# Altium PCB MT-ACcharger V1.0.0.PcbDoc (part 1 of 2)
Units mil, origin at the board's own origin, x right, y up, seen from the top; angles counter-clockwise.
Board outline 4330 x 3150 mil, 2 copper layers (Top Layer, Bottom Layer); 249 components, 156 nets, 1213 pads, 95 vias.
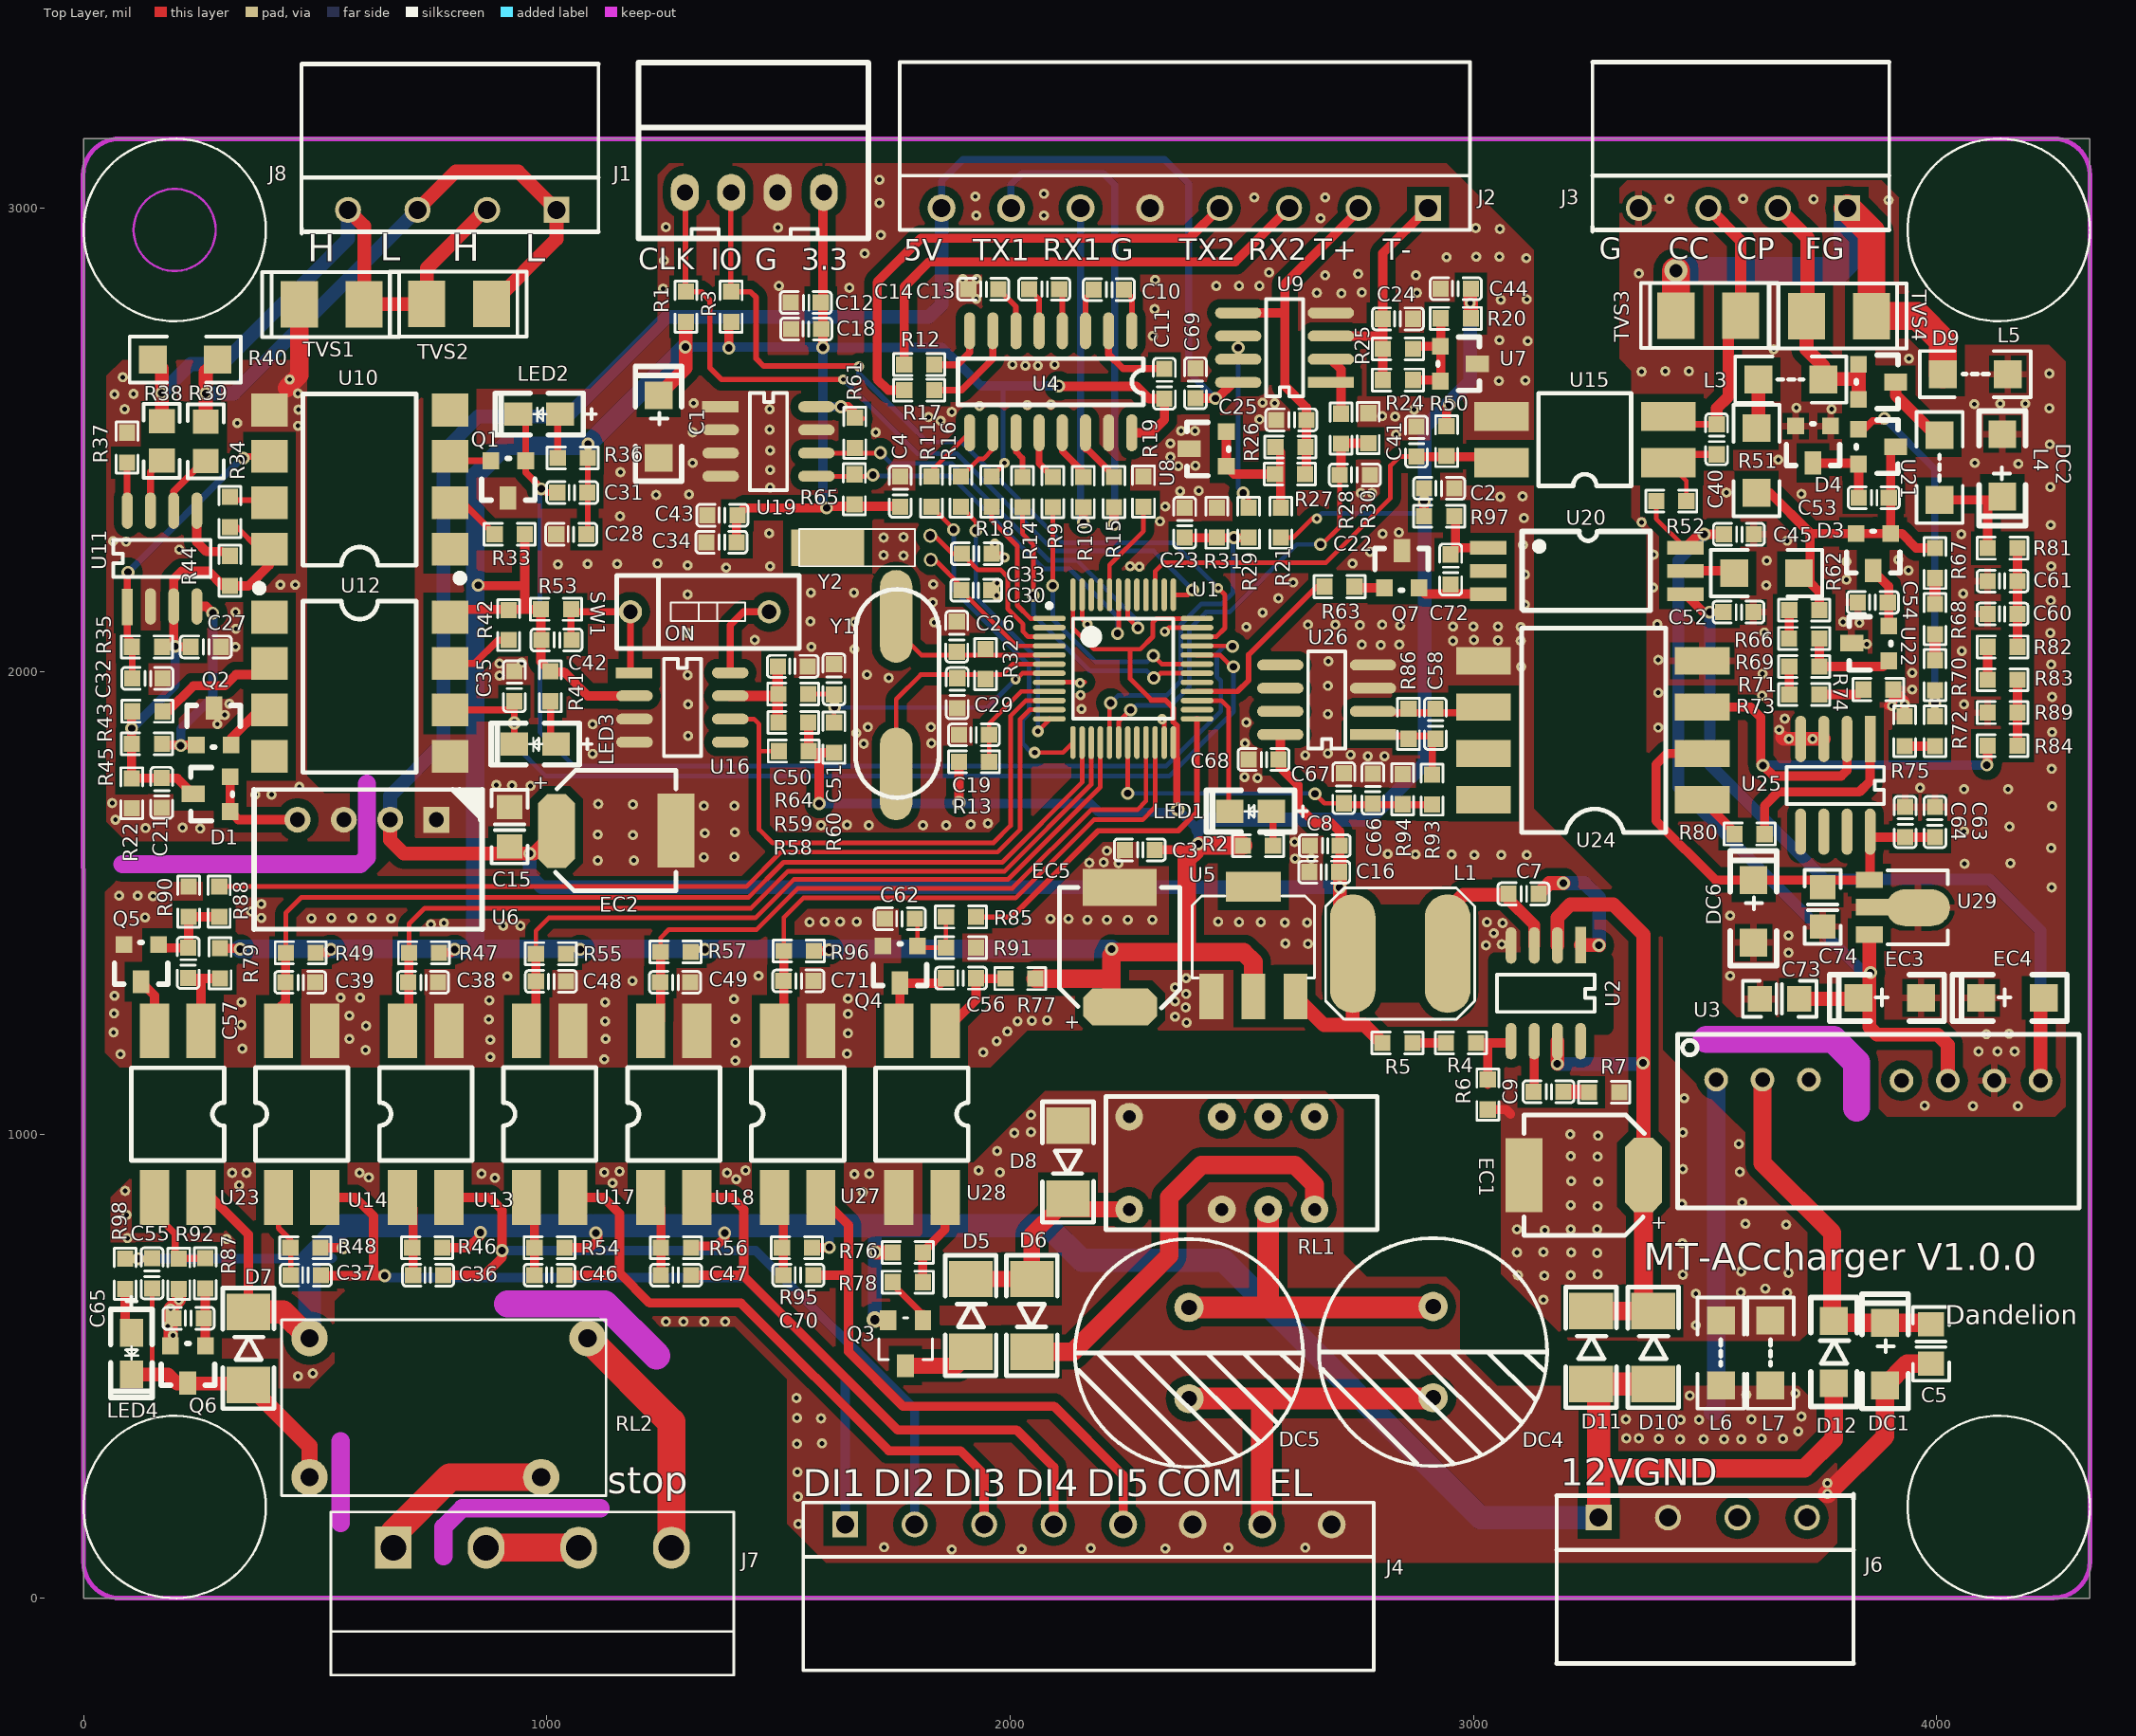
[diagram p0: Top Layer view]
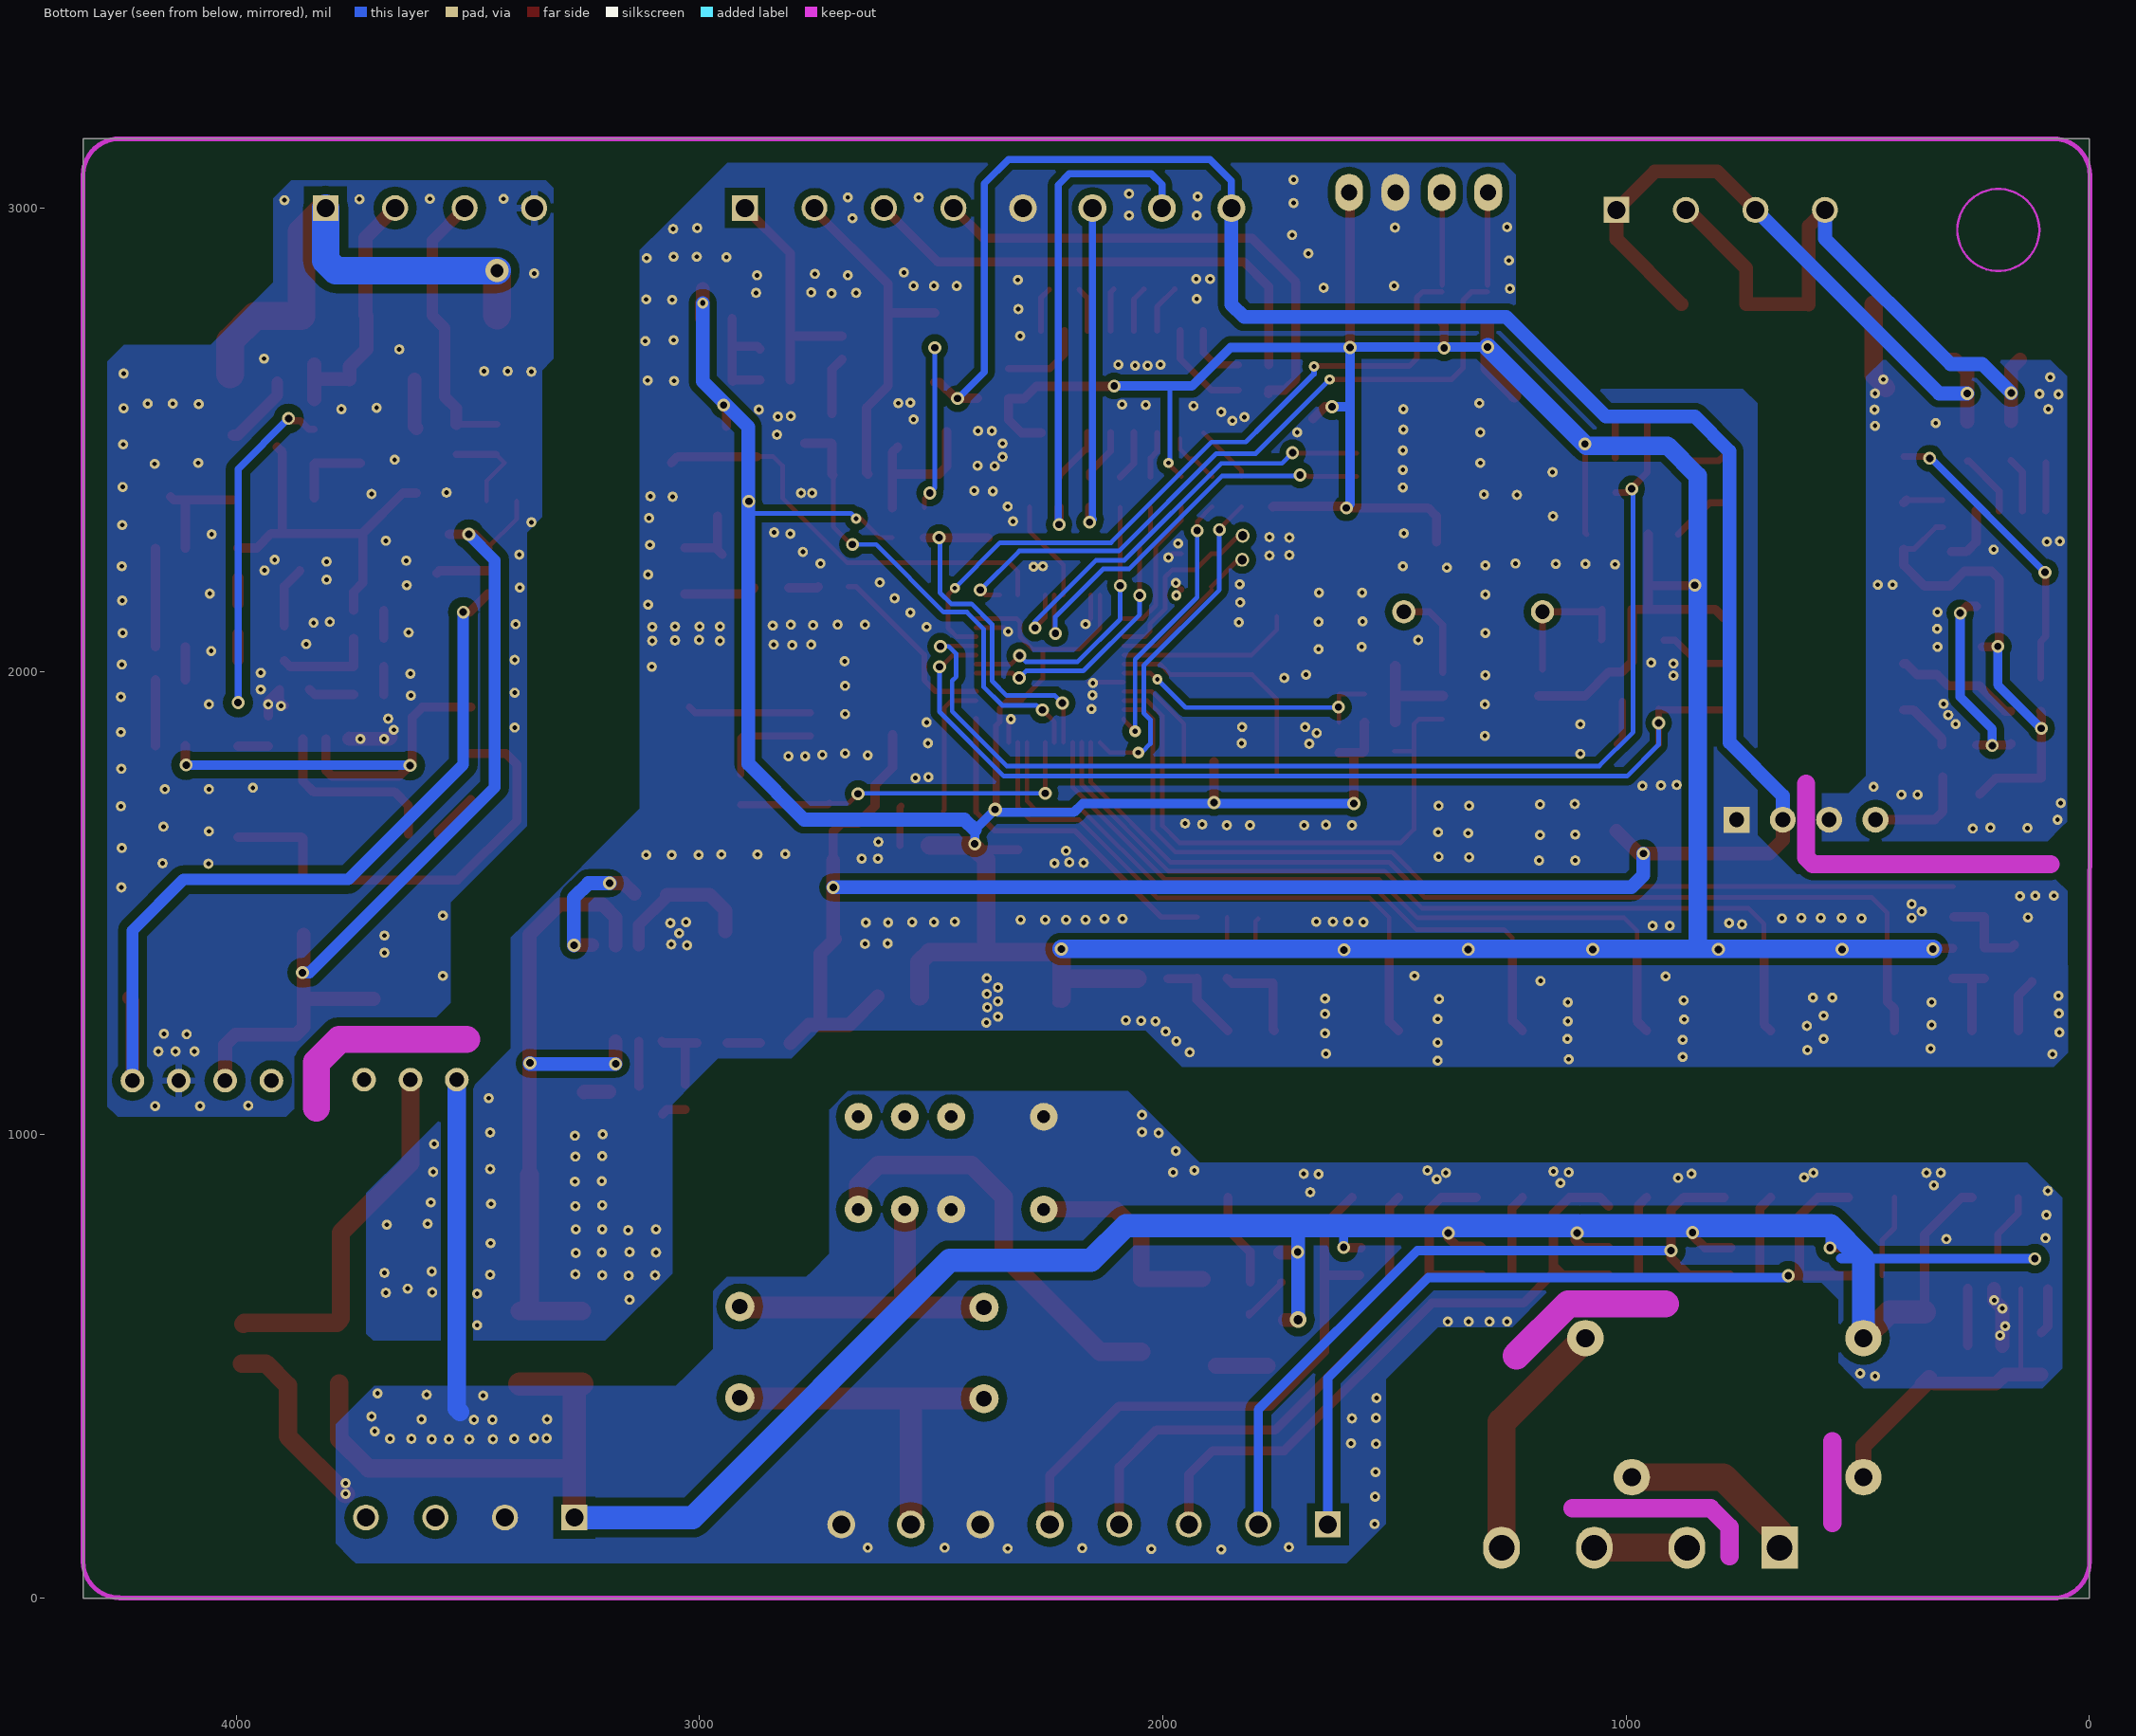
[diagram p1: Bottom Layer view, seen from below]

## Layer stack, top to bottom
Top Layer: signal copper 1.4
Dielectric: core 12.6, FR-4, Dk 4.8
Bottom Layer: signal copper 1.4

## Board outline
0,0 0,94 0,3150 4330,3150 4330,0

## Design rules (kind name [scope] priority, off if disabled: settings)
Clearance [InPoly] p1: gap=15
Clearance Clearance_1 [All] p2: gap=7
ComponentClearance [All] p1 off: gap=1 collisioncheckmode=3 verticalgap=1 showdistances=FALSE
FabricationTestpoint [(IsPad And (OnTopLayer Or OnBottomLayer))] p1: side=3 testpointundercomponent=TRUE minsize=40 maxsize=100 preferedsize=60 minholesize=0 maxholesize=40 preferedholesize=32 testpointgrid=1 allowsidetop=TRUE allowsidebottom=TRUE usegrid=TRUE gridtolerance=0.01
HoleSize [All] p1: absolutevalues=TRUE maxlimit=200 minlimit=1 maxpercent=80.000 minpercent=20.000
MinimumSolderMaskSliver [All] p1: minsoldermaskwidth=0
PlaneConnect [All] p1: planeconnectstyle=Direct reliefexpansion=20 reliefentries=4 reliefconductorwidth=10 reliefairgap=10
PolygonConnect [IsVia] p1: connectstyle=Direct reliefconductorwidth=10 reliefentries=4 polygonreliefangle="90 Angle" airgapwidth=10
PolygonConnect PolygonConnect_1 [All] p2: connectstyle=Direct reliefconductorwidth=15 reliefentries=4 polygonreliefangle="90 Angle" airgapwidth=10
RoutingVias [All] p1: holewidth=28 width=50 viastyle="Through Hole" minholewidth=10 minwidth=10 maxholewidth=28 maxwidth=50
SilkToSilkClearance [All] p1: silktosilkclearance=0
SilkToSolderMaskClearance [IsPad] p1: minsilkscreentomaskgap=0 clearancetoexposedcopper=TRUE
SolderMaskExpansion [All] p1: expansion=4
Width [All] p1: maxlimit=393.7 minlimit=5 preferedwidth=10
21 further rules are at their usual default settings.

## Components (designator, comment, footprint, x,y, rotation, side; value= is the part's Value field where it differs from the comment)
C1 "10uF,16V" CA1206 1241,2596 r90 top
C2 "104" 0603C 2926,2395 r180 top
C3 "104" 0603C 2280,1615 r0 top
C4 "104" 0603C 1763,2388 r270 top
C5 "104" 0805C 3987,507 r90 top
C7 "103" 0603C 3108,1520 r0 top
C8 "104" 0603C 2679,1624 r0 top
C9 "3.9nF" 0603C 3162,1093 r0 top
C10 "0.1uF" 0603C 2213.02,2824.15 r0 top
C11 "0.1uF" 0603C 2333,2621 r270 top
C12 "0.1uF" 0603C 1559,2796 r0 top
C13 "0.1uF" 0603C 2073.52,2825.15 r0 top
C14 "0.1uF" 0603C 1942.02,2825.15 r0 top
C15 "1uF" 0805C 919,1623 r90 top
C16 "0.1uF" 0603C 2678,1567 r180 top
C18 "0.1uF" 0603C 1560,2739 r180 top
C19 "10nF" 0603C 1922,1863 r180 top
C21 "0.1uF" 0603C 169,1738 r270 top
C22 "103" 0603C 2744,2424 r180 top
C23 "103" 0603C 2377,2321 r270 top
C24 "103" 0603C 2836.99,2761 r180 top
C25 "103" 0603C 2607,2543 r0 top
C26 "22pF" 0603C 1885,2075 r270 top
C27 "104" 0603C 264,2053 r0 top
C28 "104" 0603C 1053,2296 r180 top
C29 "22pF" 0603C 1886,1953 r90 top
C30 "15pF" 0603C 1927,2175 r180 top
C31 "100pF" 0603C 1055,2386 r180 top
C32 "220pF" 0603C 138,1985 r0 top
C33 "15pF" 0603C 1928,2254 r180 top
C34 "104" 0603C 1377,2279 r0 top
C35 "100pF" 0603C 930,1968 r90 top
C36 "104" 0603C 744,697 r180 top
C37 "104" 0603C 480,697 r180 top
C38 "104" 0603C 733,1329 r0 top
C39 "104" 0603C 468,1329 r0 top
C40 "104" 0603C 3525,2501 r90 top
C41 "104" 0603C 2877,2496 r90 top
C42 "104" 0603C 1021,2068 r0 top
C43 "0.1uF" 0603C 1379,2337 r180 top
C44 "104" 0603C 2962,2826 r180 top
C45 "104" 0603C 3573,2296 r0 top
C46 "104" 0603C 1006,697 r180 top
C47 "104" 0603C 1279,697 r180 top
C48 "104" 0603C 1009,1331 r0 top
C49 "104" 0603C 1277,1329 r0 top
C50 "104" 0603C 1531,2011 r180 top
C51 "104" 0603C 1620,1983 r270 top
C52 "104" 0603C 3572,2128 r0 top
C53 "104" 0603C 3864,2375 r0 top
C54 "104" 0603C 3862,2149 r180 top
C55 "104" 0603C 148,701 r270 top
C56 "104" 0603C 1894,1338 r180 top
C57 "104" 0603C 226,1371 r90 top
C58 "103" 0603C 2918,1887 r90 top
C60 "104" 0603C 4142,2124 r180 top
C61 "103" 0603C 4142,2195 r180 top
C62 "104" 0603C 1762,1466 r180 top
C63 "104" 0603C 3996,1675 r270 top
C64 "104" 0603C 3932,1675 r90 top
C65 "104" 0603C 227,604 r180 top
C66 "104" 0603C 2783,1747 r270 top
C67 "103" 0603C 2720,1748 r270 top
C68 "104" 0603C 2547,1810 r0 top
C69 "104" 0603C 2400,2622 r270 top
C70 "104" 0603C 1543,697 r180 top
C71 "104" 0603C 1543,1332 r0 top
C72 "100pF" 0603C 2951,2220 r270 top
C73 "0.1uF" 0805C 3619,1294 r0 top
C74 "0.1uF" 0805C 3753,1450 r90 top
D1 "BAV54C" SOT23#1 317,1698 r90 top
D3 "BAV54C" SOT23#1 3900,2298 r180 top
D4 "BAV54C" SOT23#1 3770,2530 r180 top
D5 "1N4007" DO-214AC 1915,610 r90 top
D6 "1N4007" DO-214AC 2047,610 r270 top
D7 "1N4007" DO-214AC 356,539 r90 top
D8 "1N4007" DO-214AC 2125,941 r270 top
D9 "BAV54C" SOT23#1 3831,2662 r270 top
D10 "1N4007" DO-214AC 3388,541 r90 top
D11 "1N4007" DO-214AC 3254,541 r90 top
D12 "B2020W" 1206D 3778,531 r90 top
DC1 "10uF,16V" CA1206 3888,593.92 r90 top
DC2 "10uF,16V" CA1206 4142,2377 r270 top
DC4 "2200uF/25V" CAP12.5*20 2913,531 r270 top
DC5 "2200uF/25V" CAP12.5*20 2386,529 r270 top
DC6 "10uF,16V" CA1206 3604,1550 r90 top
EC1 "100uF,25V" C100UF16VEJ 3367,913 r180 top
EC2 "100uF/35V" C100UF16VEJ 1021,1656 r0 top
EC3 "10uF,25V" CA1206 3831,1295 r180 top
EC4 "10uF,25V" CA1206 4096,1295 r180 top
EC5 "100uF/35V" C100UF16VEJ 2237,1276 r90 top
J1 "CON4" CON04_2.54 1448,3034 r0 top
J2 "CON8" KF2EDG-8P-3.81mm 2902,3000 r180 top
J3 "HEADER 4" KF2EDG-4P-3.81mm 3807,3000 r180 top
J4 "CON8" KF2EDG-8P-3.81mm 1644,159 r0 top
J6 "HEADER 4" KF2EDG-4P-3.81mm 3270,174 r0 top
J7 "4 HEADER" CON-5.08MM-4P 969,109 r0 top locked (schematic designator JP1)
J8 "4 HEADER" KF2EDG-4P-3.81mm 1021,2996 r180 top
L1 "22uH" LC7*7*3_L 2842,1391 r180 top locked
L3 "100uH" 1206L#1 3685,2630 r180 top
L4 "100uH" 1206L#1 4006,2440 r270 top
L5 "100uH" 1206L#2 4013,2641 r0 top
L6 "1uH" 1206L#1 3534,529 r90 top
L7 "1uH" 1206L#1 3641,529 r90 top
LED1 "Green" D0805 2564,1698 r270 top
LED2 "Green" D0805 1029,2555 r270 top
LED3 "Green" D0805 1020,1843 r270 top
LED4 "Green" D0805 104,573 r0 top
Q1 "8550" SOT23#1 954,2455 r180 top
Q2 "8550" SOT23#1 244,1841 r0 top
Q3 "AO3407" SOT-23L 1812,600 r180 top
Q4 "9013" SOT23#2 1800,1408 r180 top
Q5 "9013" SOT23#2 162,1411 r180 top
Q6 "9013" SOT23#2 263,545.33 r180 top
Q7 "8550" SOT23#1 2808,2180 r0 top
R1 "10K" 0603R 1300,2787 r270 top
R2 "4.7K" 0603R 2535,1624 r180 top
R3 "10K" 0603R 1398,2787 r270 top
R4 "1.2k/1%" 0603R 2973,1198 r0 top
R5 "43k/1%" 0603R 2836,1198 r0 top
R6 "10k/1%" 0603R 3031,1087 r270 top
R7 "6.8k" 0603R 3282,1092 r0 top
R9 "0R" 0603R 2092.33,2387.01 r90 top
R10 "10R" 0603R 2158.17,2387 r270 top
R11 "0R" 0603R 1830,2388 r90 top
R12 "10R" 0603R 1804,2662 r180 top
R13 "0R" 0603R 1922,1805 r0 top
R14 "0R" 0603R 2026.5,2387.01 r90 top
R15 "10R" 0603R 2224,2387 r270 top
R16 "0R" 0603R 1894,2388 r90 top
R17 "10R" 0603R 1804,2607 r180 top
R18 "0R" 0603R 1960,2388 r90 top
R19 "0R" 0603R 2288,2388 r270 top
R20 "100R" 0603R 2962,2762 r0 top
R21 "100R" 0603R 2584,2320.99 r270 top
R22 "Res Semi" 0603R 104,1737 r90 top
R24 "4k7/1%" 0603R 2837,2629 r0 top
R25 "4k7/1%" 0603R 2837,2696 r0 top
R26 "4k7/1%" 0603R 2605,2484.5 r180 top
R27 "4k7/1%" 0603R 2604,2426 r180 top
R28 "2k/1%" 0603R 2714,2524 r90 top
R29 "2k/1%" 0603R 2515,2321 r90 top
R30 "4k7/1%" 0603R 2773,2525 r270 top
R31 "4k7/1%" 0603R 2446,2320.99 r270 top
R32 "1MR" 0603R 1947,2016 r270 top
R33 "75R" 0603R 920,2296 r0 top
R34 "NC" 0603R 316,2344 r270 top
R35 "1.2k" 0603R 137,2053 r0 top
R36 "5.1K" 0603R 1056,2461 r0 top
R37 "20k" 0603R 94,2483 r90 top
R38 "10R" 0805R 169,2455 r90 top
R39 "10R" 0805R 264,2454 r90 top
R40 "120R/NC" 1206R 290,2673 r180 top
R41 "1.2K" 0603R 1008,1968 r270 top
R42 "NC" 0603R 918,2100 r270 top
R43 "150R" 0603R 138,1914 r0 top
R44 "10k" 0603R 316,2217 r90 top
R45 "10K" 0603R 137,1844 r0 top
R46 "10K" 0603R 742,756 r0 top
R47 "10K" 0603R 735,1393 r0 top
R48 "10K" 0603R 479,756 r0 top
R49 "10K" 0603R 469,1393 r0 top
R50 "10K" 0603R 2942,2497 r270 top
R51 "1K" 1206R 3611,2385 r90 top
R52 "10K" 0603R 3427,2368 r0 top
R53 "10K" 0603R 1020,2134 r180 top
R54 "10K" 0603R 1006,756 r0 top
R55 "10K" 0603R 1009,1391 r0 top
R56 "10K" 0603R 1279,756 r0 top
R57 "10K" 0603R 1278,1395 r0 top
R58 "10K" 0603R 1533,1828 r180 top
R59 "10K" 0603R 1532,1890 r180 top
R60 "10K" 0603R 1620,1857 r90 top
R61 "10k" 0603R 1665,2515 r270 top
R62 "10R" 1206R 3703,2212 r180 top
R63 "1k" 0603R 2711,2183 r0 top
R64 "1K" 0603R 1532,1951 r0 top
R65 "10K" 0603R 1664,2393 r90 top
R66 "20K/1%" 0603R 3714,2132 r0 top
R67 "4K7/1%" 0603R 3996,2234 r90 top
R68 "51R/1%" 0603R 3996,2113 r90 top
R69 "2K7/1%" 0603R 3713.99,2071.33 r180 top
R70 "1K1/1%" 0603R 3996,1992 r90 top
R71 "1K1/1%" 0603R 3714,2010.67 r0 top
R72 "2K7/1%" 0603R 3996,1871 r90 top
R73 "51R/1%" 0603R 3714,1950 r180 top
R74 "4K7/1%" 0603R 3874,1961 r180 top
R75 "20K/1%" 0603R 3931,1871 r270 top
R76 "10K" 0603R 1779,746 r180 top
R77 "1K" 0603R 2022,1337 r180 top
R78 "5.1K" 0603R 1779,682 r180 top
R79 "2K" 0603R 295,1370 r90 top
R80 "200R/1%" 0603R 3596,1649 r180 top
R81 "10R" 0603R 4142.01,2266 r0 top
R82 "33K/1%" 0603R 4142,2053 r180 top
R83 "33K/1%" 0603R 4142.01,1982 r0 top
R84 "31K6/1%" 0603R 4142,1840 r180 top
R85 "2K" 0603R 1894,1470 r180 top
R86 "100K/1%" 0603R 2860,1887 r90 top
R87 "5.1K" 0603R 263,701 r270 top
R88 "10K" 0603R 293,1503 r90 top
R89 "10K/1%" 0603R 4142.01,1911 r0 top
R90 "3K" 0603R 227,1503 r90 top
R91 "10K" 0603R 1894,1404 r180 top
R92 "4K7" 0603R 206,700 r270 top
R93 "10K/1%" 0603R 2911,1745 r270 top
R94 "20K/1%" 0603R 2847.48,1745.85 r90 top
R95 "10K" 0603R 1540,756 r0 top
R96 "10K" 0603R 1544,1397 r0 top
R97 "200R" 0603R 2926,2335 r0 top
R98 "10K" 0603R 90,700 r270 top
RL1 "G6S-2" G6S-2 2257,1039 r0 top
RL2 "JQ1P-12V" HF32F-12V 488,301 r180 top
SW1 "拨码开关" SW1 1180,2129 r270 top
TVS1 "BA301N" 3528TVS 536,2792 r0 top
TVS2 "BA301N" 3528TVS 811,2793 r0 top
TVS3 "BA301N" 3528TVS 3507,2768 r180 top
TVS4 "BA301N" 3528TVS 3789,2767 r0 top
U1 "STM32F103C8T6" LQFP48_N 2244,2006 r0 top locked
U2 "EUP3484" SOP8#1 3231,1405 r270 top
U3 "WRA1215S-3WR2" WRA1215S-3WR2 3874,1118 r0 top (schematic designator U8)
U4 "SP3232" SO-16 2263,2735 r270 top
U5 "AMS1117-3.3" SOT223 2525,1417 r0 top locked
U6 "B0505D-1W" B0505S-1WR2 762,1680 r180 top
U7 "TL431" SOT23#1 2928,2701 r270 top
U8 "TL431" SOT23#1 2467,2443 r90 top
U9 "LM258" SOP8#2 2692,2624 r180 top
U10 "6N136" LC-SMD-8_6.3mm 596,2414 r90 top
U11 "PCA82C251T" SOP8#1 95,2144 r90 top
U12 "6N136" LC-SMD-8_6.3mm 596,1967 r270 top
U13 "PS2501L-1" DIP-4 688.3,865.21 r180 top
U14 "PS2501L-1" DIP-4 420.63,865.21 r180 top
U15 "PS2501L-1" DIP-4 3420,2450 r270 top
U16 "SP706SEN" SOP8#1 1193,1997 r0 top
U17 "PS2501L-1" DIP-4 955.96,865.21 r180 top
U18 "PS2501L-1" DIP-4 1223.63,865.21 r180 top
U19 "AT24C16" SOP8#1 1379,2571 r0 top
U20 "W314" "w314 - duplicate" 3032,2267 r270 top
U21 "CJ431" SOT23#1 3831,2522 r270 top
U22 "CJ431" SOT23#2 3897,2023 r90 top
U23 "PS2501L-1" DIP-4 254,1224 r0 top
U24 "HCNR201" "HCNR201 - S" 3494,1723 r180 top
U25 "LM258" SOP8#2 3856,1854 r270 top
U26 "LM258" SOP8#2 2783,1864 r180 top
U27 "PS2501L-1" DIP-4 1491.3,865.21 r180 top
U28 "PS2501L-1" DIP-4 1860,1224 r0 top
U29 "LM78L05" SOT-89 3854,1550 r270 top
Y1 "8MHz" ZS_SMD 1754,1779 r90 top
Y2 "32.768KHz" ZS-32.768 1720,2267 r180 top

## Footprints (in the part's own frame and the unit in brackets; to place one, negate y for a bottom-side part, rotate by r counter-clockwise, add the part's x,y. Pads: shape width x height; smd on the part's side, far side on the other; paste and mask are expansions set on the pad)
0603C [mil]
  rect 35x35 smd: 1(-32.5,0) 2(32.5,0)
  silkscreen extent -55,-24 55,24
0603R [mil]
  rect 35x35 smd: 1(-32.5,0) 2(32.5,0)
  silkscreen extent -55,-24 55,24
0805C [mil]
  rect 52x56 smd: 1(-0.58,-0.68) 2(84.42,-0.68)
  silkscreen extent -38,-40 121,38
0805R [mil]
  rect 52x56 smd: 1(0,0) 2(85,0)
  silkscreen extent -37,-39 122,39
1206D [mil]
  rect 60x60 smd: 1(-67.5,0) 2(67.5,0)
  silkscreen extent -118,-50 118,50
1206L#1 [mil]
  rect 60x60 smd: 1(-70,0) 2(70,0)
  silkscreen extent -120,-50 120,50
1206L#2 [mil]
  rect 60x60 smd: 1(0.16,0.47) 2(140.16,0.47)
  silkscreen extent -50,-50 190,50
1206R [mil]
  rect 60x60 smd: 1(0.33,-0.04) 2(140.33,-0.04)
  silkscreen extent -50,-50 190,50
3528TVS [mil]
  rect 80x100 smd: 1(70,0) 2(-70,0)
  silkscreen extent -150,-70 146,70
B0505S-1WR2 [mil]
  rect 56x56 hole 32: 1(0,0)
  round 56 hole 32: 4(100,0) 5(300,0) 7(200,0)
  silkscreen extent -98,-65 394,236
C100UF16VEJ [mil]
  oct 80x160 smd: 1(-0.01,-0.43)
  rect 80x160 smd: 2(257.94,0.35)
  silkscreen extent -2,-130 258,130
CA1206 [mil]
  rect 60x60 smd: 1(-0.08,-0.48) 2(-135.08,-0.48)
  silkscreen extent -185,-50 62,50
CAP12.5*20 [mm]
  round 1.6 hole 0.85: 1(-2.5,0) 2(2.5,0)
  silkscreen extent -6.25,-6.25 6.25,6.25
CON04_2.54 [mil]
  oval 60x80 hole 35: 1(-150,0) 2(-50,0) 3(50,0) 4(150,0)
  silkscreen extent -250,-100 246,280
CON-5.08MM-4P [mm] "CON-5.08MM-4P"
  rect 2x2.3 hole 1.4: 1(-7.62,0)
  oval 2x2.3 hole 1.4: 2(-2.54,0) 3(2.54,0) 4(7.62,0)
  silkscreen extent -11.04,-6.98 11.04,1.96
D0805 [mil]
  rect 50x60 smd: 1(-0.34,-0.09) 2(-0.34,-90.09)
  silkscreen extent -45,-140 45,77
DIP-4 [mm]
  rect 1.6x3 smd: 1(-0.008,0.015) 2(-2.548,0.015) 3(-2.548,-9.129) 4(-0.008,-9.129)
  silkscreen extent -3.82,-7.1 1.26,-2.02
DO-214AC [mm]
  rect 2x2.4 smd: 1(-2,0) 2(2,0)
  silkscreen extent -3.3,-1.4 3.3,1.4
G6S-2 [mil]
  round 60 hole 27.56: 1(0,-200) 3(200,-200) 4(300,-200) 5(400,-200) 8(400,0) 9(300,0) 10(200,0) 12(0,0)
  silkscreen extent -50,-244 535,43
"HCNR201 - S" [mm]
  rect 3x1.5 smd: 1(0,0) 2(0,-2.54) 3(0,-5.08) 4(0,-7.62) 5(12,-7.62) 6(12,-5.08) 7(12,-2.54) 8(12,0)
  silkscreen extent 2,-9.41 9.9,1.79
HF32F-12V [mm]
  round 2 hole 1: 1(0,1.016) 2(0,-6.604) 3(-12.7,1.016) 4(-15.24,-6.604)
  silkscreen extent -16.26,-7.62 1.52,2.03
KF2EDG-4P-3.81mm [mil]
  rect 56x56 hole 39.37: 1(0,0)
  round 56 hole 39.37: 2(150,0) 3(300,0) 4(450,0)
  silkscreen extent -91,-315 550,50
KF2EDG-8P-3.81mm [mil]
  rect 56x56 hole 39.37: 1(0,0)
  round 56 hole 39.37: 2(150,0) 3(300,0) 4(450,0)
  round 60 hole 39.37: 5(600,0) 6(750,0) 7(900,0) 8(1050,0)
  silkscreen extent -91,-315 1141,47
LC7*7*3_L [mm]
  oval 2.5x6.5 smd: 1(-2.6,0) 2(2.6,0)
  Top Layer pour cut-out: -1.803,2.705 1.854,2.705 1.854,-2.705 -1.803,-2.705
  silkscreen extent -4.09,-3.61 4.09,3.61, body extent -2.46,-2.4 1.85,2.4, height 3.5
LC-SMD-8_6.3mm [mm]
  rect 1.8x2 smd: 1(-3.81,-4.95) 2(-1.27,-4.95) 3(1.27,-4.95) 4(3.81,-4.95) 5(3.81,4.95) 6(1.27,4.95) 7(-1.27,4.95) 8(-3.81,4.95)
  silkscreen extent -5.6,-5.7 4.7,3.1
LQFP48_N [mm] "Thin QFP, 48-Leads, Body 7x7mm, Pitch 0.5mm, IPC Medium Density"
  oval 1.8x0.3 smd: 1(-4.05,2.75) 2(-4.05,2.25) 3(-4.05,1.75) 4(-4.05,1.25) 5(-4.05,0.75) 6(-4.05,0.25) 7(-4.05,-0.25) 8(-4.05,-0.75) 9(-4.05,-1.25) 10(-4.05,-1.75) 11(-4.05,-2.25) 12(-4.05,-2.75) 25(4.05,-2.75) 26(4.05,-2.25) 27(4.05,-1.75) 28(4.05,-1.25) 29(4.05,-0.75) 30(4.05,-0.25) 31(4.05,0.25) 32(4.05,0.75) 33(4.05,1.25) 34(4.05,1.75) 35(4.05,2.25) 36(4.05,2.75)
  oval 0.3x1.8 smd: 13(-2.75,-4.05) 14(-2.25,-4.05) 15(-1.75,-4.05) 16(-1.25,-4.05) 17(-0.75,-4.05) 18(-0.25,-4.05) 19(0.25,-4.05) 20(0.75,-4.05) 21(1.25,-4.05) 22(1.75,-4.05) 23(2.25,-4.05) 24(2.75,-4.05) 37(2.75,4.05) 38(2.25,4.05) 39(1.75,4.05) 40(1.25,4.05) 41(0.75,4.05) 42(0.25,4.05) 43(-0.25,4.05) 44(-0.75,4.05) 45(-1.25,4.05) 46(-1.75,4.05) 47(-2.25,4.05) 48(-2.75,4.05)
  silkscreen extent -4.17,-2.75 2.75,3.57, body extent -3.5,-3.5 3.5,3.5, height 1.6
SO-16 [mil]
  oval 80x24 smd: 1(-0.2,-0.3) 2(-0.2,-50.3) 3(-0.2,-100.3) 4(-0.2,-150.3) 5(-0.2,-200.3) 6(-0.2,-250.3) 7(-0.2,-300.3) 8(-0.2,-350.3) 9(219.8,-350.3) 10(219.8,-300.3) 11(219.8,-250.3) 12(219.8,-200.3) 13(219.8,-150.3) 14(219.8,-100.3) 15(219.8,-50.3) 16(219.8,-0.3)
  silkscreen extent 60,-375 160,25
SOP8#1 [mm]
  rect 2x0.6 smd: 1(-0.123,0.006)
  oval 2x0.6 smd: 2(-0.093,-1.264) 3(-0.093,-2.534) 4(-0.093,-3.804) 5(5.157,-3.804) 6(5.157,-2.534) 7(5.157,-1.264) 8(5.157,0.006)
  silkscreen extent 1.52,-4.57 3.55,0.77
SOP8#2 [mm]
  rect 2.54x0.6 smd: 1(-0.006,0.006)
  oval 2.54x0.6 smd: 2(-0.006,-1.264) 3(-0.006,-2.534) 4(-0.006,-3.804) 5(5.074,-3.804) 6(5.074,-2.534) 7(5.074,-1.264) 8(5.074,0.006)
  silkscreen extent 1.52,-4.57 3.55,0.77
SOT23#1 [mil]
  rect 36x36 smd: 1(-0.49,0.35) 3(74.51,0.35)
  rect 36x50 smd: 2(37.51,80.35)
  silkscreen extent -20,-5 95,85
SOT23#2 [mil]
  rect 36x36 smd: 1(-0.08,0.75) 3(74.92,0.75)
  rect 36x50 smd: 2(37.92,80.75)
  silkscreen extent -20,-4 95,86
SOT223 [mm]
  rect 1.3x2.5 smd: 1(-2.3,-3) 2(0,-3) 3(2.3,-3)
  rect 3x1.65 smd: 4(0,3)
  silkscreen extent -3.35,-2.01 3.35,2.5
SOT-23L [mm]
  rect 0.9x1.1 smd: 1(0,0) 3(1.905,0)
  rect 0.914x1.27 smd: 2(0.965,2.5)
  silkscreen extent -0.51,-0.13 2.41,2.16
SOT-89 [mm]
  rect 0.9x1.473 smd: 1(0,0.006) 3(2.994,0.006)
  rect 0.9x2 smd: 2(1.494,0.273)
  oval 2.032x3.5 smd: 2(1.519,2.686)
  silkscreen extent -0.53,1.02 3.53,4.32
SW1 [mm]
  round 1.27 hole 0.8: 1(0.011,0.015) 2(0.011,7.62)
  silkscreen extent -1.99,-0.74 2.01,9.26
"w314 - duplicate" [mm]
  rect 0.76x2 smd: 1(0,0) 2(1.27,0) 3(2.54,0) 4(2.54,10.8) 5(1.27,10.8) 6(0,10.8)
  silkscreen extent -0.89,1.85 3.43,8.89
WRA1215S-3WR2 [mm] "WRA1215S-3WR2"
  round 1.3 hole 0.8: 1(-8.89,0.025) 2(-6.35,0.025) 3(-3.81,0.025) 5(1.27,-0.025) 6(3.81,-0.025) 7(6.35,-0.025) 8(8.89,-0.025)
  silkscreen extent -11,-7 11,2.5
ZS-32.768 [mil]
  round 30 hole 20: 1(-107.67,-26) 2(-108.67,26)
  rect 157.48x78.74 smd: 3(114,0)
  silkscreen extent -75,-40 175,40
ZS_SMD [mil]
  oval 200x70 smd: 1(0,0) 2(340,0)
  silkscreen extent -51,-92 399,88

## Part data
C1 DC2: library part CAP2, "贴片钽电容/16V/10uF/A型3216/AVX"
C2 C3 C38 C39 C48 C49 C71 C72: library part CAP, "0603贴片电容/50V/0.1uF/±10%/X7R"
C4 C19 C27 C28 C29 C31 C32 C33 C34 C35 C36 C37 C42 C43 C44 C45 C46 C47 C50 C51 C52 C53 C54 C60 C63 C64 C66 C68 C69 C70: library part CAP1, "0603贴片电容/50V/0.1uF/±10%/X7R"
C5 C8 C10 C11 C12 C13 C14 C15 C16 C18 C24 C25 C40 C41 C55 C56 C57 C62 C65 C73 C74: library part CAP, "Capacitor"
C7 C9: library part CAP
C21: library part "Cap Semi", "Capacitor (Semiconductor SIM Model)"
C22 C23: library part CAP1, "Capacitor"
C26 C30: library part CAP1, "0603贴片电容/50V/1uF/±10%/X7R"
C58 C61 C67: library part CAP1, "0603贴片电容/50V/10nF/±10%/X7R"
D5 D6 D7 D8 D10 D11 D12: library part DIODE
DC1 DC4 DC5 DC6 EC2 EC5: library part CAP2
EC1: library part "CAPACITOR POL", "贴片铝电解电容/16V/100uF/6.3*5.4"
EC3 EC4: library part "CAPACITOR POL", "Capacitor"
J1: "Connector"
J3 J6: library part "4 HEADER", "4 Pin Header"
J7 J8: "4 Pin Header"
L1 L3 L6 L7: library part INDUCTOR
L4 L5: library part INDUCTOR, "贴片功率电感/100uH/LC7*7*3"
LED1 LED2 LED3 LED4: library part LED, "17-21/GHC-XS1T2M/3T,绿色LED/0805/亿光"
Q1 Q2 Q7: library part PNP, "PNP Transistor"
Q3: library part PMOS
Q4 Q5 Q6: library part NPN
R1 R3 R13 R18 R19 R24 R25 R26 R27 R28 R29 R30 R31 R32 R33 R34 R35 R36 R37 R38 R39 R40 R41 R42 R43 R44 R45 R50 R76 R77 R78 R79 R85 R87 R88 R90 R91 R92 R98: library part RES1
R2 R63 R97: library part RES1, "0603贴片电阻/200R/0.1W/±5%"
R4 R5 R6 R7: library part R_S
R9 R10 R11 R12 R14 R15 R16 R17 R20 R21 R52: library part RES-1, "RES"
R22: "Semiconductor Resistor"
R46 R48 R54 R56 R95: library part RES1, "0603贴片电阻/2K/0.1W/±5%"
R47 R49 R53 R55 R57 R58 R59 R60 R61 R65 R96: library part RES1, "0603贴片电阻/10K/0.1W/±5%"
R51: library part RES2, "五色环/轴状/金属膜电阻/1K/1W/±1%"
R62: library part RES1, "0603贴片电阻/10R/0.1W/±5%"
R64: library part RES1, "0603贴片电阻/47R/0.1W/±5%"
R66 R75: library part RES1, "0603贴片电阻/20K/0.1W/±1%"
R67 R74: library part RES1, "0603贴片电阻/4.7K/0.1W/±1%"
R68 R73: library part RES1, "0603贴片电阻/51R/0.1W/±1%"
R69 R72: library part RES1, "0603贴片电阻/2.7K/0.1W/±1%"
R70 R71: library part RES1, "0603贴片电阻/1.1K/0.1W/±1%"
R80: library part RES1, "0603贴片电阻/200R/0.1W/±1%"
R81 R82 R83 R89: library part RES1, "0603贴片电阻/33K/0.1W/±1%"
R84 R86: library part RES1, "0603贴片电阻/31.6K/0.1W/±1%"
R93 R94: library part RES1, "0603贴片电阻/10K/0.1W/±1%"
SW1: library part "SW SPST", "直插拔码开关1位/DIP2/蓝色/脚距8mm"
TVS1 TVS2 TVS3 TVS4: library part TVS
U4: library part MAX232ESE
U5: library part AMS1117
U6: library part BXXXXD-1W
U9: library part AS358P-E1
U13 U14 U17 U18 U27: library part PS2501-1, "PS2501L-1,SOP4,CEL"
U15 U23 U28: library part PS2501-1
U16: "SP706SEN,SOP8,Sipex"
U19: library part AT24C64, "EEPROM/64K/2.7V/SOP8/ATMEL"
U20: library part TLP113, "TLP114A,5_PIN,TOSHIBA"
U21 U22: library part TL431, "TL431,SOT23/ST/ON"
U24: library part HCNR200, "HCNR201,DIP8,HP"
U25 U26: library part AS358P-E1, "LM258,SOIC8,TI"
U29: library part LM7805
Y1 Y2: library part CRYSTAL, "32.768KHz晶振/圆柱形/2*6mm"

## Free pads (board coordinates)
  round 22 hole 10: 0(77,1516) 0(1664,915) 1(117,1516) 1(1696,916) 2(150,1515) 2(1682,876) 3(133,1469) 3(206,643) 4(67,1300) 4(182,587) 5(66,1262) 5(188.08,625.08) 6(65,1221) 6(193,567) 7(80,1174) 7(90,879) 8(93,827) 8(341,1286) 9(95,777) 9(341,1237) 10(321,918) 10(343,1186) 11(352,918) 11(384,1498) 12(336,891) 12(384,1468) 13(362,1482) 13(596,918) 14(492,1467) 14(616,908) 15(535,1468) 15(859,916) 16(580,1468) 16(888,907) 17(463,479) 17(622,1468) 18(495,485) 18(664,1467) 19(309,775) 19(555,1296) 20(597,1296) 20(1124,919) 21(574,1257) 21(1157,921) 22(574,1207) 22(1142,896) 23(610,1235) 23(1389,918) 24(609,1183) 24(1429,923) 25(750,1454) 25(1409,904) 26(778,1457) 26(1932,923) 27(906,1451) 27(1978,919) 28(943,1451) 28(2009,1004) 29(915,1342) 29(2045,1006) 30(876,1290) 30(2045,1043) 31(875,1249) 31(1972,965) 32(878,1205) 32(1257,597) 33(878,1168) 33(1295,597) 34(1126,1286) 34(1340,597) 35(1126,1245) 35(1385,597) 36(1127,1207) 36(1539,432) 37(1124,1163) 37(1592,388) 38(1185,1332) 38(1540,389) 39(1457,1343) 39(1540,333) 40(1404,1293) 40(1594,334) 41(1407,1250) 41(1541,272) 42(1407,1199) 42(1542,219) 43(1407,1160) 43(1543,160) 44(1650,1261) 44(1728,110) 45(1650,1219) 45(1874,105) 46(1648,1175) 46(2025,106) 47(1650,1294) 47(2174,108) 48(1567,1459) 48(2335,107) 49(1600,1460) 49(2471,109) 50(1633,1460) 50(2637,109) 51(1669,1460) 51(4243,2643) 52(1942,1178) 52(4243,2568) 53(1971,1202) 53(4244,2490) 54(1994,1223) 54(4245,2398) 55(2016,1245) 55(4246,2316) 56(2047,1246) 56(4247,2227) 57(2080,1247) 57(4246,2153) 58(2087,1466) 58(4245,2083) 59(2126,1466) 59(4247,2015) 60(2167,1464) 60(4249,1945) 61(2209,1464) 61(4249,1869) 62(2254,1464) 62(4248,1790) 63(2307,1464) 63(4249,1709) 64(2171,1587) 64(4247,1619) 65(2202,1588) 65(4248,1534) 66(85,2635) 66(2234,1586) 67(108,2599) 67(2209,1613) 68(67,2598) 68(2380,1338) 69(89,2566) 69(2380,1304) 70(445,2630) 70(2379,1275) 71(464,2565) 71(2381,1242) 72(332,2536) 72(2356,1318) 73(463,2600) 73(2356,1288) 74(425,2187) 74(2356,1255) 75(457,2187) 75(2449,1460) 76(2494,1459) 76(3805,2237) 77(2541,1459) 77(3805,2198) 78(2593,1458) 78(3798,2107) 79(2641,1458) 79(3833,2105) 80(2594,1413) 80(3633,2239) 81(2643,1412) 81(3632,2186) 82(2815,1606) 82(3628,2084) 83(2875,1605) 83(3624,1995) 84(2953,1605) 84(3623,1948) 85(3002,1604) 85(3397,2102) 86(3060,1604) 86(3677,2282) 87(3115,1604) 87(4081,2577) 88(3209,1001) 88(4082,2450) 89(3210,954) 89(4053,2296) 90(3211,900) 90(4057,2168) 91(3210,848) 91(4054,2044) 92(3210,796) 92(4059,1929) 93(3211,746) 93(3964,1749) 94(3210,697) 94(4059,1746) 95(3269,998) 95(4154,1746) 96(3268,953) 96(3554,1473) 97(3269,899) 97(3554,1343) 98(3268,846) 98(3680,1393) 99(3267,796) 99(3680,1430) 100(3267,745) 100(4090,1180) 101(3268,699) 101(4131,1180) 102(3154,794) 102(4168,1180) 103(3094,796) 103(4107,1217) 104(3094,746) 104(4156,1218) 105(3151,747) 105(3947,1961) 106(3096,697) 106(3947,1997) 107(3153,696) 107(3903.5,1925.5) 108(3151,644) 108(3931,1929) 109(3455,1079) 109(3939,2218) 110(3452,1005) 110(3917,2241) 111(3452,926) 111(3732,1854.24) 112(3450,851) 112(3680.76,1854.24) 113(3451,766) 113(3672,1898) 114(3452,698) 115(3480,657) 115(3660,1874) 116(3480,589) 116(3849,2059) 117(3399,2025) 117(3573,980) 118(3399,1954) 118(3575,920) 119(3399,1879) 119(3630,668) 120(3389,2252) 120(3675,806) 121(3388,2181) 121(3580,854) 122(3363,2322) 122(3587,808) 123(3363,2647) 123(3578,705) 124(3414,2648) 124(3680,702) 125(3465,2648) 125(3577,660) 126(3357,2859) 126(3677,659) 127(4137,2578) 128(4191,2578) 129(4176,2448) 130(3896,3017) 131(3734,3019) 132(891,1755) 132(3582,3020) 133(925,1754) 133(3423,3020) 134(965,1753) 134(4157,1665) 135(1481,2566) 135(4159,1586) 136(1481,2522) 136(4059,1655) 137(1482,2477) 137(4060,1585) 138(1482,2435) 138(3974,1063) 139(1482,2397) 139(4078,1062) 140(1159,2430) 140(4175,1062) 141(1158,2335) 141(3546,2386) 142(1236,2381) 142(3648,2695) 143(1307,2382) 143(3697,2569) 144(1024,2231) 144(3773,2566) 145(1088,2232) 145(3658,2457) 146(1152,2232) 146(3708,2383) 147(1239,2233) 147(3940,2675) 148(1304,2229) 148(3357,345) 149(1387,2224) 149(3400,344) 150(1480,2298) 150(3446,343) 151(1482,2227) 151(3497,343) 152(1727,2289) 152(3541,343) 153(1770,2290) 153(3578,343) 154(1727,2251) 154(3622,344) 155(1770,2250) 155(3668,344) 156(1570,2170) 156(3701,360) 157(1663,2170) 157(3708,392) 158(1569,2108) 158(3600,386) 159(1664,2107) 159(3487,385) 160(1571,2053) 160(3447,385) 161(1664,2048) 161(3329,386) 162(1691,1993) 162(3330,345) 163(1304,2166) 163(3467,437) 164(1304,2083) 164(3589,439) 165(1304,1992) 165(3695,442) 166(1305,1929) 166(3764,248) 167(1305,1861) 167(3764,225) 168(64,2281) 168(1111,1714) 169(92,2280) 169(1186,1713) 170(207,2263) 170(1110,1648) 171(328,2128) 171(1186,1647) 172(329,2092) 172(1110,1592) 173(328,2053) 173(1188,1592) 174(289.01,1886.35) 174(1339,1710) 175(305,1906) 175(1405,1710) 176(315,1930) 176(1341,1651) 177(214,1663) 177(1406,1653) 178(252,1661) 178(1339,1599) 179(134,1662) 179(1405,1600) 180(69,1680) 180(1693,1880) 181(62,1716) 181(1684,1844) 182(371,1734) 182(1829,1880) 183(406,1734) 183(1830,1845) 184(466,1751) 184(1738,1986) 185(463,2530) 185(1099,1886) 186(1099,1822) 187(1718,3061) 188(1718,3011) 189(1721,2942) 190(1686,2902) 191(1653,2828) 192(1499,2958) 193(1501,2832) 194(1257,2959) 195(1253,2887) 196(1251,2826) 197(1925,3025) 198(1927,2984) 199(2073,3031) 200(2073,2984) 201(2527,3023) 202(2680,3023) 203(2312,2782) 204(2308,2724) 205(2313,2845) 206(2445,2832) 207(2494,2832) 208(2538,2832) 209(2559,2861) 210(2670,2978) 211(2680,2855) 212(2751,2858) 213(2662,2817) 214(2715,2816) 215(2759,2818) 216(2876,2855) 217(2878,2817) 218(3005,2957) 219(3057,2955) 220(3006,2895) 221(3056,2895) 222(3114,2892) 223(3115,2803) 224(3059,2802) 225(3117,2713) 226(3056,2715) 227(3055,2627) 228(3112,2628) 229(2942,2894) 230(2803,2551) 231(2831,2550) 232(2833,2511) 233(2872,2565) 234(2545,2580) 235(2571,2579) 236(2538,2544) 237(2369,2519) 238(2399,2519) 239(2346,2492) 240(2346,2463) 241(2363,2443) 242(2400,2444) 243(2367,2389) 244(2407,2390) 245(2259,2227) 246(2279,2226) 247(2611,2192) 248(2579,2158) 249(2545,2127) 250(2510,2096) 251(2643,2101) 252(2702,2101) 253(2755,2100) 254(2803,2101) 255(2842,2099) 256(2759,2058) 257(2800,2057) 258(2840,2058) 259(2956,2097) 260(3000,2097) 261(3053,2097) 262(3102,2096) 263(2956,2066) 264(3001,2068) 265(3053,2067) 266(3102,2066) 267(3058,2377) 268(3106,2378) 269(3109,2331) 270(3107,2273) 271(3111,2209) 272(3111,2144) 273(3103,2010) 274(2005,2662) 275(2033,2660) 276(2060,2660) 277(2096,2662) 278(2037,2575) 279(2088,2576) 280(2687,2022) 281(2686,1969) 282(2686,1908) 283(2686,1823) 284(2735,1820) 285(2772,1817) 286(2808,1817) 287(2637,1819) 288(2506,1772) 289(2534,1770) 290(2507,1845) 291(2510,1890) 292(2615,1596) 293(2650,1596) 294(2614,1632) 295(1592,1668) 296(1648,1669) 297(1695,1668) 298(1812,1668) 299(1862,1668) 300(1915,1670) 301(1952,1672) 302(1668,1867) 303(1449,2068) 304(1317,2579) 305(1315,2516) 306(1315,2450) 307(1824,2549) 308(1874,2560) 309(1850,2541) 311(1834,2188) 312(1833,2149) 313(1836,2106) 314(2804,2297) 315(2839,2300) 316(2777,2258) 317(2739,2233) 318(2757,2385) 319(2781,2385) 320(2152,1949) 321(2154,1919) 322(2151,1975) 323(1928,2847) 324(1927,2804) 325(1898,2847) 326(1934,2573) 327(1710,2516) 328(2323.5,2324) 329(2335,2356) 330(1988,2246) 331(3029,1459) 332(3063,1457) 333(3027,1409) 334(3061,1411) 335(3044,1435) 336(898,2017) 337(898,1991) 338(946,2019)

## Via types
v1: diameter 28, hole 16, Top Layer to Bottom Layer, 77 vias
v2: diameter 22, hole 10, Top Layer to Bottom Layer, 12 vias
v3: diameter 26, hole 12, Top Layer to Bottom Layer, 2 vias
v4: diameter 36, hole 20, Top Layer to Bottom Layer, 1 vias
v5: diameter 50, hole 28, Top Layer to Bottom Layer, 1 vias
v6: diameter 30, hole 16, Top Layer to Bottom Layer, 1 vias
v7: diameter 24, hole 12, Top Layer to Bottom Layer, 1 vias

## Nets (pads, with @x,y where several pads share a name; then routed paths per layer and width w, separated by ;. In a path a pad name is that pad's centre, name@x,y a point inside that pad or via, vN(x,y) a via of type N, cw(c..) or ccw(c..) an arc to the next point about the centre after c; other vN are vias at no path point)
/RST: C51.2 R60.2 R64.2 U1.7 | length 612
  Top Layer w10: R64.2@1564.5,1951 1619.5,1951 C51.2@1620,1950.5 R60.2@1620,1889.5 ; v2(2012,1983) 2013,1983 2026.16,1996.16 U1.7@2084.55,1996.16
  Bottom Layer w10: v1(1621,1923) 1621,1922 1951,1922 v2(2012,1983)
AC-SWITCH: R88.2 U1.11 | length 2089.2
  Top Layer w10: R88.2@293,1535.5 1430.5,1535.5 1505,1610 1973,1610 2022,1659 2022,1897 2042.42,1917.42 U1.11@2084.55,1917.42
ACLI: J7.1 RL2.3 | length 399.5
  Top Layer w60: J7.1@669,109 669,139 791,261 RL2.3@988,261
ACLO: J7.2 J7.3 | length 200
  Top Layer w60: J7.2@869,109 J7.3@1069,109
ASS5V: C63.2 C64.1 C74.2 DC6.1 U24.2 U25.8 U29.1 | length 975.9
  Top Layer w20: U24.2@3494,1823 3418,1823 3394,1799 3394,1678 3522.08,1549.92 DC6.1@3604.48,1549.92 3854.16,1549.92 U29.1@3854.25,1550.02 3856.24,1552.01 3856.24,1640 3858.74,1642.5 C63.2@3996,1642.5
ASS_+15V: C45.1 C73.2 EC3.1 R52.1 U3.6 U20.6 U29.3 | length 1982.5
  Top Layer w10: R52.1@3394.5,2368 3394.5,2329.7 U20.6@3457.2,2267
  Top Layer w20: U20.6@3457.2,2267 3486.2,2296 v1(3498,2296) C45.1@3540.5,2296
  Top Layer w25: v1(3857,1350) v1@3857,1352.25
  Top Layer w30: C73.2@3703.42,1293.32 EC3.1@3851.58,1293.32 ; v1@3854.25,1350 3854.25,1232.75 3871,1216 4002,1216 4024,1194 U3.6@4024,1117 ; v1@3854.25,1352.25 U29.3@3854.25,1432.12
  Bottom Layer w25: v1(3498,2296) 3442,2240 3442,1750 3842,1350 v1(3857,1350)
ASS_-15V: C52.1 EC4.2 U3.8 U20.4 | length 1765.7
  Top Layer w20: U20.4@3457.2,2167 3496.2,2128 v1(3510,2128)
  Top Layer w30: U3.8@4224,1117 4224,1288.4 EC4.2@4231.08,1295.48
  Bottom Layer w25: v1(3510,2128) 3510,1799 3758,1551 4114,1551 4224,1441 U3.8@4224,1117
ASS_GND: C45.2 C52.2 C54.2 C60.2 C61.2 C63.1 C64.2 C73.1 C74.1 D4.1 D4.3 DC2.2 DC6.2 EC3.2 EC4.1 J3.4 L5.2 pad.51@4243,2643 pad.52@4243,2568 pad.53@4244,2490 pad.54@4245,2398 pad.55@4246,2316 pad.56@4247,2227 pad.57@4246,2153 pad.58@4245,2083 pad.59@4247,2015 pad.60@4249,1945 pad.61@4249,1869 pad.62@4248,1790 pad.63@4249,1709 pad.64@4247,1619 pad.65@4248,1534 pad.76@3805,2237 pad.77@3805,2198 pad.78@3798,2107 pad.79@3833,2105 pad.80@3633,2239 pad.81@3632,2186 pad.82@3628,2084 pad.83@3624,1995 pad.84@3623,1948 pad.85@3397,2102 pad.86@3677,2282 pad.87@4081,2577 pad.88@4082,2450 pad.89@4053,2296 pad.90@4057,2168 pad.91@4054,2044 pad.92@4059,1929 pad.93@3964,1749 pad.94@4059,1746 pad.95@4154,1746 pad.96@3554,1473 pad.97@3554,1343 pad.98@3680,1393 pad.99@3680,1430 pad.100@4090,1180 pad.101@4131,1180 pad.102@4168,1180 pad.103@4107,1217 pad.104@4156,1218 pad.105@3947,1961 pad.106@3947,1997 pad.107@3903.5,1925.5 pad.108@3931,1929 pad.109@3939,2218 pad.110@3917,2241 pad.111@3732,1854.24 pad.112@3680.76,1854.24 pad.113@3672,1898 pad.115@3660,1874 pad.116@3849,2059 pad.117@3399,2025 pad.118@3399,1954 pad.119@3399,1879 pad.120@3389,2252 pad.121@3388,2181 pad.122@3363,2322 pad.123@3363,2647 pad.124@3414,2648 pad.125@3465,2648 pad.126@3357,2859 pad.127 pad.128 pad.129 pad.130 pad.131 pad.132@3582,3020 pad.133@3423,3020 pad.134@4157,1665 pad.135@4159,1586 pad.136@4059,1655 pad.137@4060,1585 pad.138@3974,1063 pad.139@4078,1062 pad.140@4175,1062 pad.141@3546,2386 pad.142@3648,2695 pad.143@3697,2569 pad.144@3773,2566 pad.145@3658,2457 pad.146@3708,2383 pad.147@3940,2675 R74.1 R75.1 R89.1 U3.7 U22.2 U24.4 U25.3 U25.4 U29.2 | length 205.3
  Top Layer w20: U25.3@3756.24,1854.24 U25.3@3756.24,1860.76 ; pad.107@3896,1926 3906.5,1936.5 R74.1@3906.5,1961 3931,1936.5 R75.1@3931,1903.5
  Top Layer w30: 3666,1858 3669.76,1854.24 pad.112@3680.76,1854.24 U25.4@3706.24,1854.24 pad.111@3732,1854.24 U25.3@3756.24,1854.24
CANH: J8.2 J8.4 R38.2 R40.2 TVS1.1 TVS2.2 | length 1356.1
  Top Layer w30: R40.2@149.67,2673.04 169,2653.71 v1(169,2601) R38.2@169,2540 ; J8.4@571,2996 606,2961 TVS1.1@606,2792 607,2793 TVS2.2@741,2793 741,2870 867,2996 J8.2@871,2996
  Bottom Layer w30: v1(169,2601) 231.5,2663.5 300.5,2663.5 571,2934 J8.4@571,2996
CANL: J8.1 J8.3 R39.2 R40.1 TVS2.1 | length 1403.8
  Top Layer w30: R39.2@264,2539 v1(264,2600) 264,2647.37 R40.1@289.67,2673.04 R40.1@298.04,2673.04 ; J8.3@721,2996 804,3079 938,3079 J8.1@1021,2996 1021,2933 TVS2.1@881,2793
  Bottom Layer w30: v1(264,2600) 325,2600 J8.3@721,2996
CANRX: C35.1 LED3.2 U1.32 U12.6 | length 2072.6
  Top Layer w10: U1.32@2403.45,2035.53 2452.47,2035.53 v1@2471,2017
  Top Layer w15: U12.6@790.88,1917 928,1917 930,1919 v1(930,1889) 930,1843.43 LED3.2@929.91,1843.34
  Bottom Layer w10: v1(930,1889) 930,1842 998,1774 2343,1774 2482,1913 v1(2482,2010)
CANTX: C31.2 LED2.2 Q1.1 U1.33 | length 2526.4
  Top Layer w10: U1.33@2403.45,2055.21 2478.79,2055.21 v1(2480,2054)
  Top Layer w15: LED2.2@938.91,2555.34 954.49,2539.76 Q1.1@954.49,2454.65 954.49,2429.51 v1@989,2395 ; v1@998,2386 C31.2@1022.5,2386
  Bottom Layer w10: v1(988,2394) 985,2391 985,1869 1058,1796 2337,1796 2455,1914 2455,1980 2446,1989 2446,2038 2462,2054 v1(2480,2054)
CC: C40.2 J3.3 TVS3.2 U15.2 | length 604.6
  Top Layer w15: U15.2@3437.41,2533.5 C40.2@3525,2533.5
  Top Layer w25: J3.3@3507,3000 3577,2930 TVS3.2@3577,2768 3550,2741 3550,2593 3525,2568 C40.2@3525,2533.5
CC-AD: C66.2 C67.2 R93.2 R94.1 U1.19 | length 776.8
  Top Layer w10: U1.19@2253.84,1846.55 2253.84,1737.16 v1(2254,1737) ; v1(2658,1736) 2678.5,1715.5 C67.2@2720,1715.5
  Top Layer w15: C67.2@2720,1715.5 2723,1712.5 R93.2@2911,1712.5
  Bottom Layer w10: v1(2254,1737) 2657,1737 v1(2658,1736)
CP: D9.1 D9.3 J3.2 L3.1 TVS4.2 | length 564
  Top Layer w30: J3.2@3657,3000 3721,2936 3721,2769 TVS4.2@3719,2767 3719,2695 3755,2659 L3.1@3755,2630 3756,2631 3831.35,2631 ; D9.3@3831.35,2587.49 3831.35,2631 ; D9.1@3831.35,2662.49 3831.35,2631
CP_OUT: C53.2 D3.1 D3.3 R51.1 R62.1 R66.2 R67.2 U21.2 | length 800.4
  Top Layer w20: R51.1@3611.04,2385.33 3640,2385.33 3726.67,2298.66 ; R66.2@3746.5,2132 3746.5,2171.5 3726.67,2191.33 3726.67,2298.66 ; U21.2@3911.35,2484.49 3900.49,2473.64 D3.1@3900.49,2297.65 ; R67.2@3996,2266.5 3955.5,2266.5 3924.35,2297.65 D3.1@3900.49,2297.65 ; 3726.67,2298.66 3727.68,2297.65 D3.3@3825.49,2297.65 D3.1@3900.49,2297.65
CPWM_OUT: R63.1 U1.28 | length 401
  Top Layer w12: U1.28@2403.45,1956.79 2490.79,1956.79 2515,1981 2515,2036 2662,2183 R63.1@2678.5,2183